# Altium PCB Strum.PcbDoc
Units mil, origin at the board's own origin, x right, y up, seen from the top; angles counter-clockwise.
Board outline 3149.61 x 3937.01 mil, 2 copper layers (Top Layer, Bottom Layer); 5 components, 19 nets, 58 pads, 0 vias.
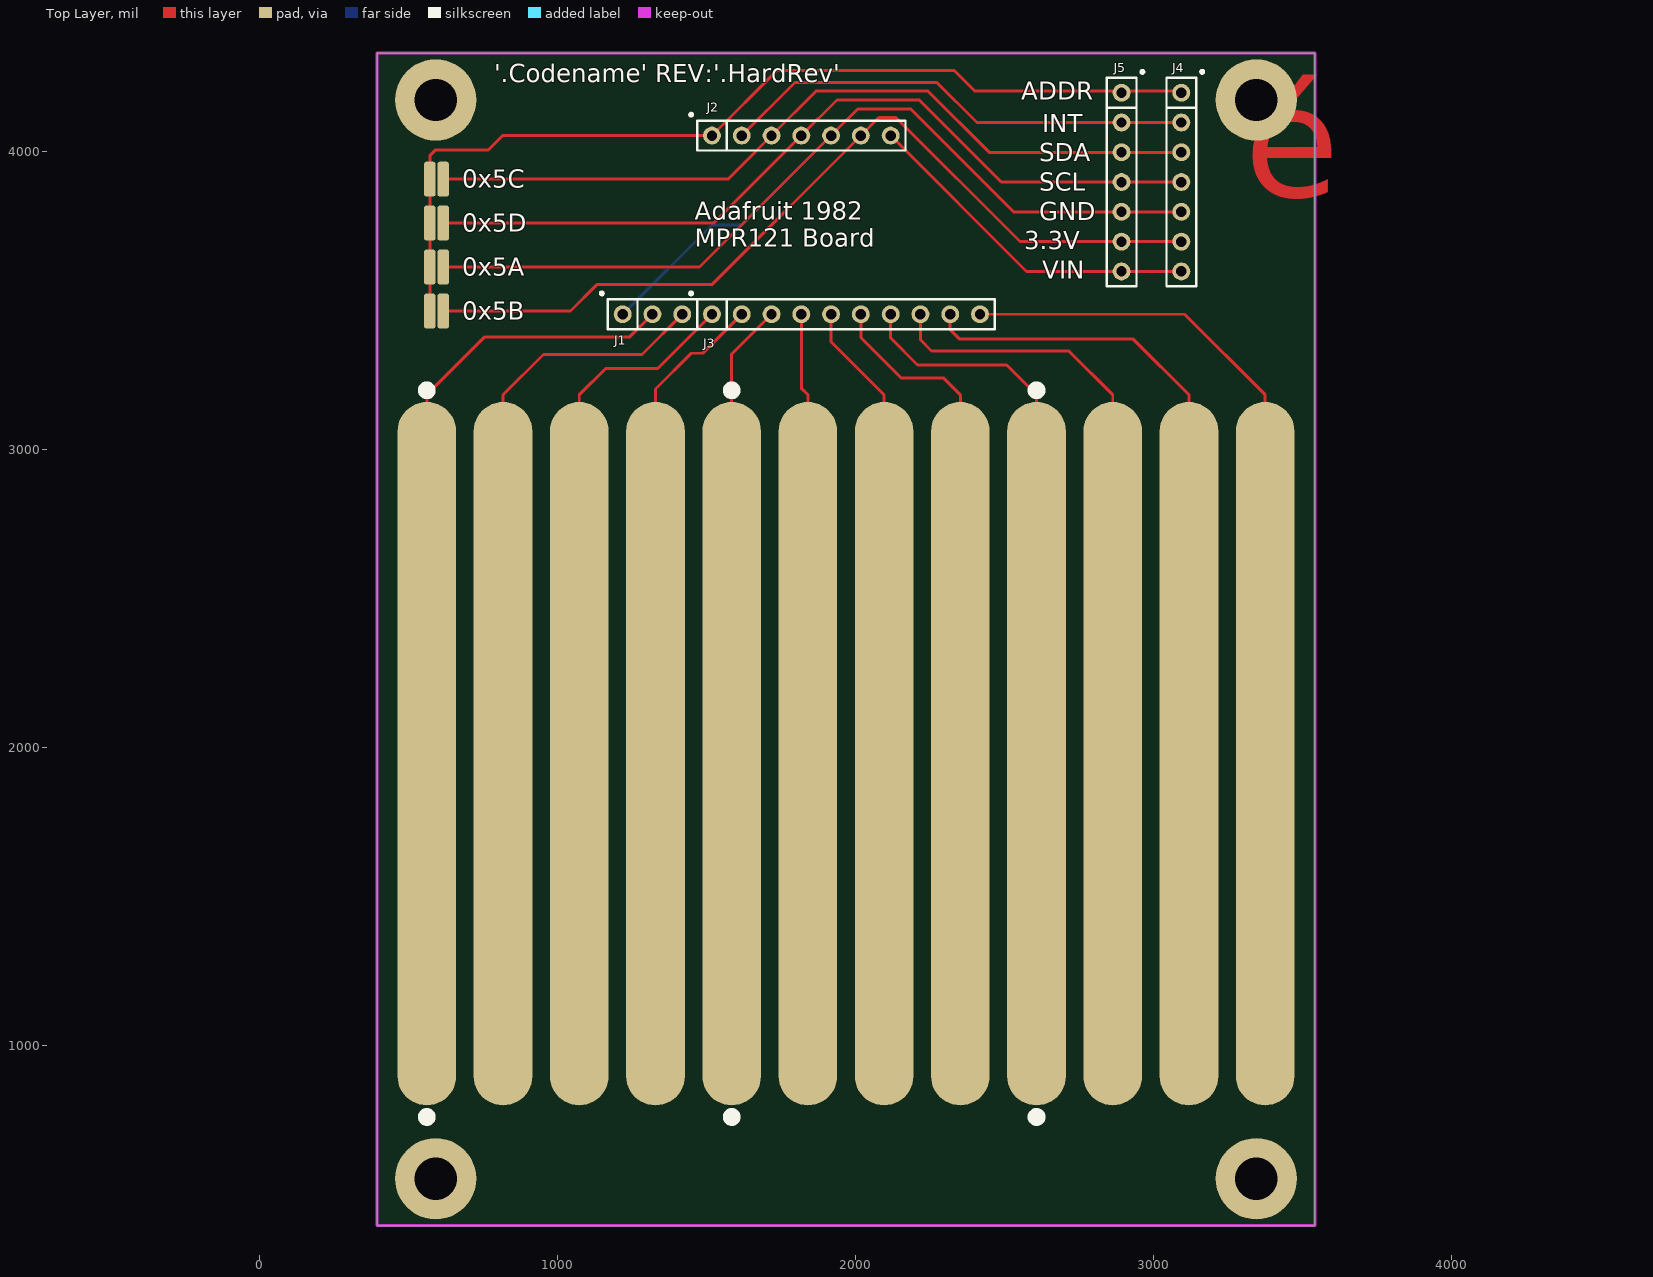
[diagram p0: Top Layer view]
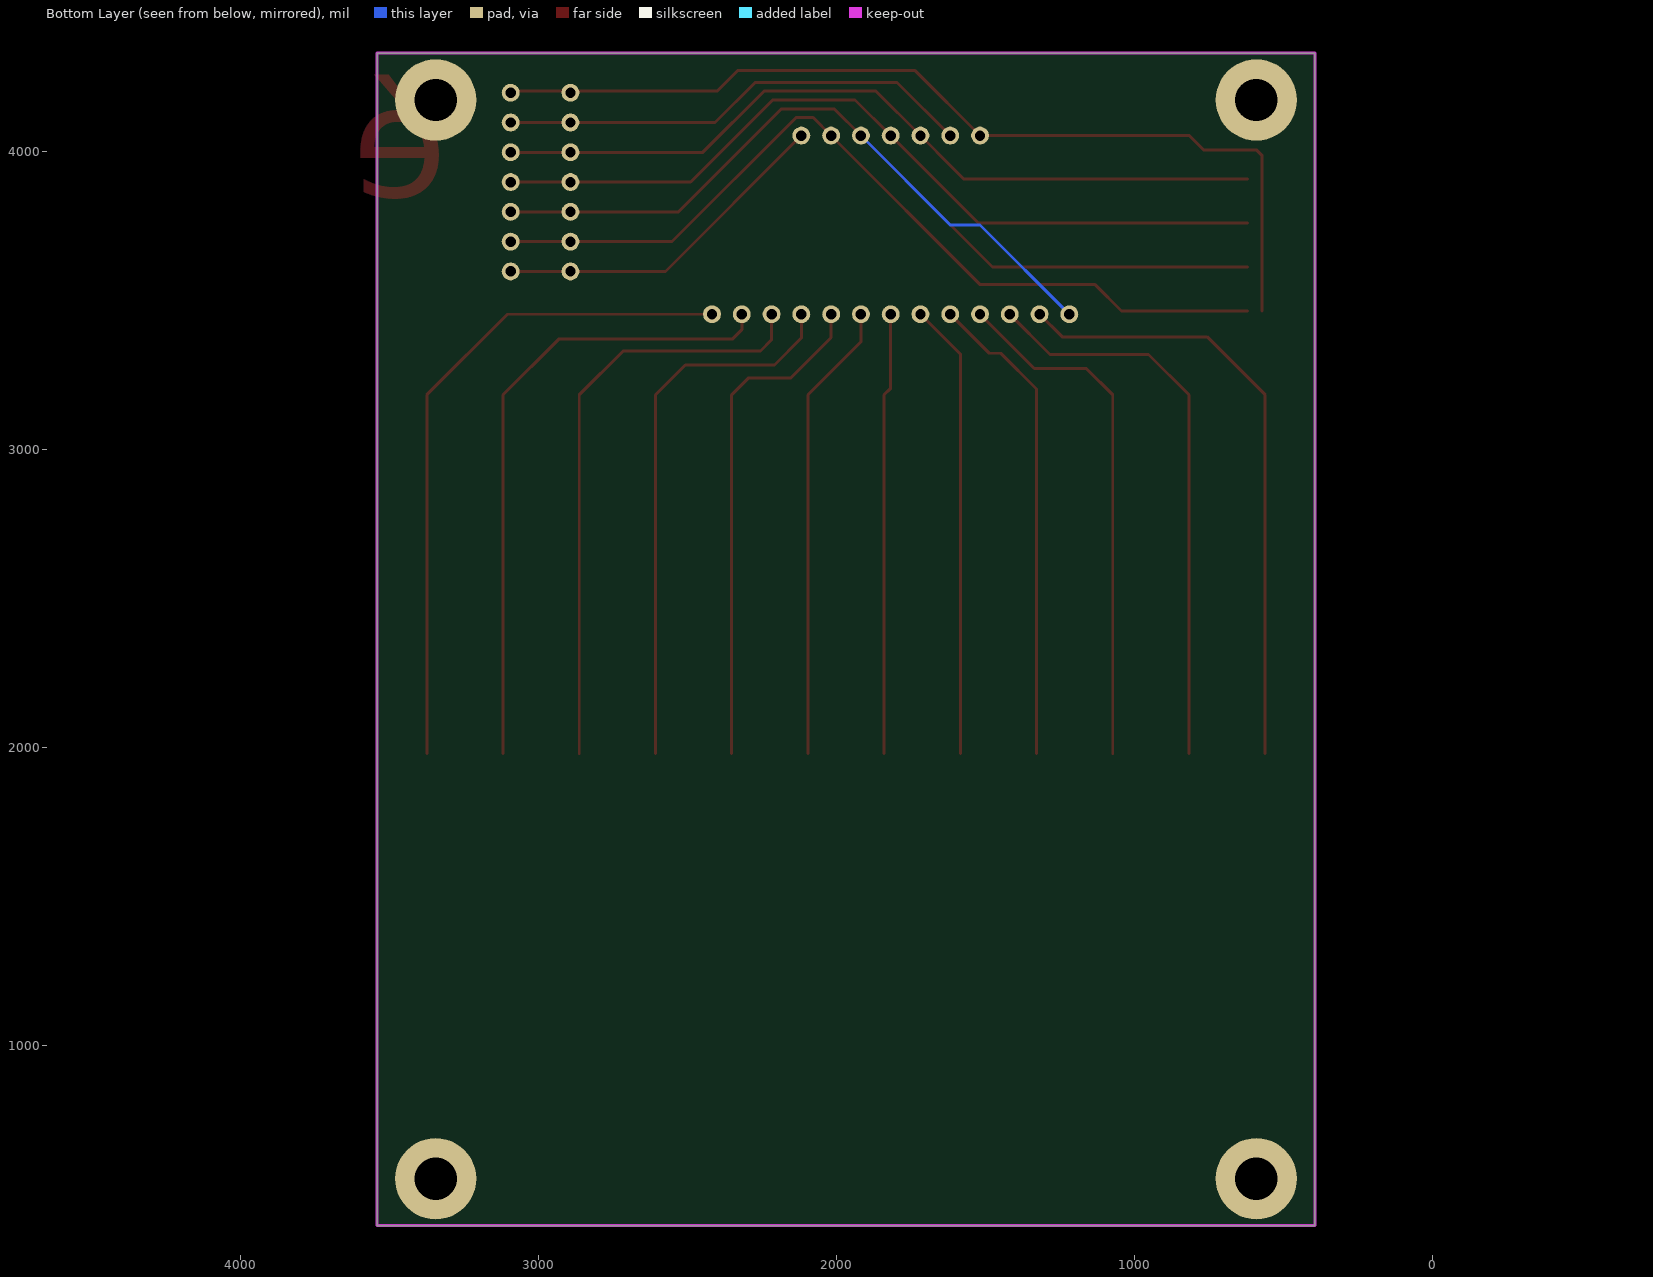
[diagram p1: Bottom Layer view, seen from below]
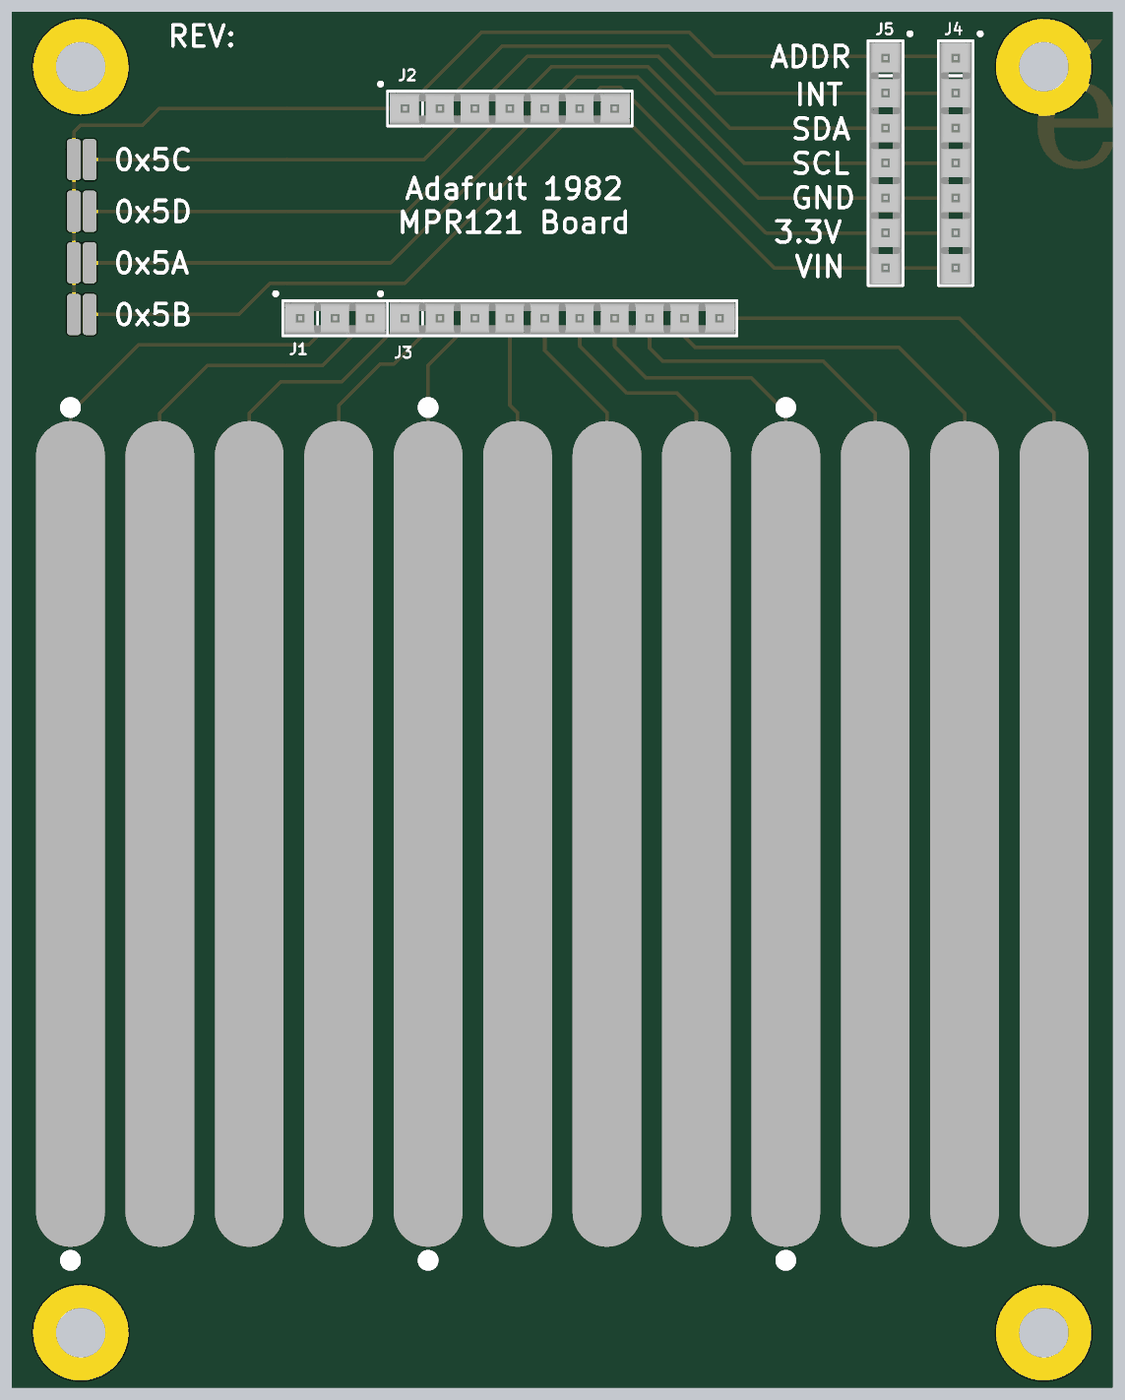
[diagram p2: 3D render of the assembled board from above, using the file's embedded part models]

## Layer stack, top to bottom
Top Solder: solder mask 0.4, Solder Resist, Dk 3.5
Top Layer: signal copper 1.4
Dielectric 1: dielectric 12.6, FR-4, Dk 4.8
Bottom Layer: signal copper 1.4
Bottom Solder: solder mask 0.4, Solder Resist, Dk 3.5

## Board outline
393.7,393.7 3543.31,393.7 3543.31,4330.71 393.7,4330.71

## Design rules (kind name [scope] priority, off if disabled: settings)
Clearance [All] p1: gap=10 ignorepadtopadclearanceinfootprint=FALSE except(0: Arc-Hole Track-Hole SMDPad-Hole THPad-Hole Via-Hole Fill-Hole Poly-Hole Region-Hole Text-Hole; 5: Arc-SMDPad Track-SMDPad SMDPad-SMDPad)
HoleSize [All] p1: absolutevalues=TRUE maxlimit=99999 minlimit=1 maxpercent=80.000 minpercent=20.000
PolygonConnect [All] p1: connectstyle=Relief reliefconductorwidth=10 reliefentries=4 polygonreliefangle="90 Angle" airgapwidth=10
RoutingVias [All] p1: holewidth=28 width=50 viastyle="Through Hole" minholewidth=28 minwidth=50 maxholewidth=28 maxwidth=50
SolderMaskExpansion [All] p1: expansion=4 istentingtop=FALSE
Width [All] p1: maxlimit=10 minlimit=10 preferedwidth=10
29 further rules are at their usual default settings.

## Components (designator, comment, footprint, x,y, rotation, side; value= is the part's Value field where it differs from the comment)
J1 "3-644456-3" TE_3-644456-3 1318.46,3453.78 r0 top
J2 "3-644456-7" TE_3-644456-7 1818.46,4053.78 r0 top
J3 "4-644456-0" TE_4-644456-0 1968.46,3453.78 r0 top
J4 "3-644456-7" TE_3-644456-7 3094.49,3897.64 r270 top
J5 "3-644456-7" TE_3-644456-7 2893.7,3897.64 r270 top

## Footprints (in the part's own frame and the unit in brackets; to place one, negate y for a bottom-side part, rotate by r counter-clockwise, add the part's x,y. Pads: shape width x height; smd on the part's side, far side on the other; paste and mask are expansions set on the pad)
TE_3-644456-3 [mil]
  round 60 hole 35: 1(-100,0) 2(0,0) 3(100,0)
  silkscreen extent -175,-50 150,75, body extent -144,-46 144,46, height 395
TE_3-644456-7 [mil]
  round 60 hole 35: 1(-300,0) 2(-200,0) 3(-100,0) 4(0,0) 5(100,0) 6(200,0) 7(300,0)
  silkscreen extent -375,-50 350,75, body extent -344,-46 344,46, height 395
TE_4-644456-0 [mil]
  round 60 hole 35: 1(-450,0) 2(-350,0) 3(-250,0) 4(-150,0) 5(-50,0) 6(50,0) 7(150,0) 8(250,0) 9(350,0) 10(450,0)
  silkscreen extent -525,-50 500,75, body extent -494,-46 494,46, height 395

## Part data
J1: "CONN HEADER VERT 3POS .100 TIN", Color=Natural, Manufacturer="TE Connectivity", Supplier Part Number 1=A31113-ND, Connector Type="Header, Unshrouded", Contact Finish=Tin, Contact Finish Thickness="150µin (3.81µm)", Contact Mating Length="0.295\" (7.49mm)", Contact Type="Male Pin", Fastening Type=-, Features=-, HelpURL=http://www.te.com/commerce/DocumentDelivery/DDEController?Action=srchrtrv&DocNm=644456&DocType=Customer+Drawing&DocLang=English, Manufacturer Part Number=3-644456-3, Mounting Type="Through Hole", Number of Positions=3, Number of Positions Loaded=All, Number of Rows=1, PartNumber=3-644456-3, Pitch="0.100\" (2.54mm)", Row Spacing=-, Series="MTA-100, AMP", Supplier 1=Digi-Key, Supplier 2=Mouser, Supplier Part Number 2=571-3-644456-3, Termination=Solder
J2 J4 J5: "CONN HEADER VERT 7POS .100 TIN", Color=Natural, Manufacturer="TE Connectivity", Supplier Part Number 1=A31117-ND, Connector Type="Header, Unshrouded", Contact Finish=Tin, Contact Finish Thickness="150µin (3.81µm)", Contact Mating Length="0.295\" (7.49mm)", Contact Type="Male Pin", Fastening Type=-, Features=-, HelpURL=http://www.te.com/commerce/DocumentDelivery/DDEController?Action=srchrtrv&DocNm=644456&DocType=Customer+Drawing&DocLang=English, Manufacturer Part Number=3-644456-7, Mounting Type="Through Hole", Number of Positions=7, Number of Positions Loaded=All, Number of Rows=1, PartNumber=3-644456-7, Pitch="0.100\" (2.54mm)", Row Spacing=-, Series="MTA-100, AMP", Supplier 1=Digi-Key, Supplier 2=Mouser, Supplier Part Number 2=571-3-644456-7, Termination=Solder
J3: "CONN HEADER VERT 10POS .100 TIN", Color=Natural, Manufacturer="TE Connectivity AMP Connectors", Supplier Part Number 1=A30844-ND, @ qty=0, Connector Type="Header, Unshrouded", Contact Finish=Tin, Contact Finish Thickness="150µin (3.81µm)", Contact Mating Length="0.295\" (7.49mm)", Contact Type="Male Pin", Factory Stock=0, Fastening Type=-, Features=-, HelpURL=http://www.te.com/commerce/DocumentDelivery/DDEController?Action=srchrtrv&DocNm=644456&DocType=Customer+Drawing&DocLang=English, Image=http://media.digikey.com/photos/Tyco%20Amp%20Photos/1-644456-0,%204-644456-0,%201-644695-0,%204-644695-0.jpg, Manufacturer Part Number=4-644456-0, Minimum Quantity=1, Mounting Type="Through Hole", Number of Positions=10, Number of Positions Loaded=All, Number of Rows=1, Packaging=Bulk, PartNumber=4-644456-0, Pitch="0.100\" (2.54mm)", Quantity Available=6514, Row Spacing=-, Series=MTA-100, Supplier 1=Digi-Key, Supplier 2=Mouser, Supplier Part Number 2=571-4-644456-0, Termination=Solder, Unit Price (USD)=0.63

## Free pads (board coordinates)
  oval 196.85x2362.2 smd mask+4: 1(561.02,1978.35) 1(816.93,1978.35) 1(1072.83,1978.35) 1(1328.74,1978.35) 1(1584.65,1978.35) 1(1840.55,1978.35) 1(2096.46,1978.35) 1(2352.36,1978.35) 1(2608.27,1978.35) 1(2864.17,1978.35) 1(3120.08,1978.35) 1(3375.98,1978.35)
  round 273 hole 142: 1(590.55,551.18) 1(590.55,4173.23) 1(3346.46,551.18) 1(3346.46,4173.23)
  rrect50% 39.37x118.11 smd: 2(570.87,3464.57) 2(570.87,3612.2) 2(570.87,3759.84) 2(570.87,3907.48) 2(616.08,3464.57) 2(616.08,3612.2) 2(616.08,3759.84) 2(616.08,3907.48)

## Nets (pads, with @x,y where several pads share a name; then routed paths per layer and width w, separated by ;. In a path a pad name is that pad's centre, name@x,y a point inside that pad or via, vN(x,y) a via of type N, cw(c..) or ccw(c..) an arc to the next point about the centre after c; other vN are vias at no path point)
3.3V: J2.6 J4.6 J5.6 pad.2@616.08,3464.57 | length 2916
  Top Layer w10: pad.2@620.08,3464.57 1043.31,3464.57 1131.89,3553.15 1517.83,3553.15 J2.6 2078.86,4114.17 2135.83,4114.17 2552.36,3697.64 J4.6
ADDR: J2.1 J4.1 J5.1 pad.2@570.87,3464.57 pad.2@570.87,3612.2 pad.2@570.87,3759.84 pad.2@570.87,3907.48 | length 3194.2
  Top Layer w10: pad.2@570.87,3464.57 570.87,3612.2 570.87,3759.84 570.87,3907.48 570.87,3986.22 590.55,4005.91 767.72,4005.91 815.59,4053.78 J2.1 1736.34,4271.65 2332.68,4271.65 2401.57,4202.76 3089.37,4202.76 J4.1
GND: J1.1 J2.5 J4.5 J5.5 pad.2@616.08,3612.2 | length 3786.4
  Top Layer w10: pad.2@620.08,3612.2 1476.89,3612.2 J2.5 2008.39,4143.7 2185.04,4143.7 2531.1,3797.64 J4.5
  Bottom Layer w10: J1.1 1518.46,3753.78 1618.46,3753.78 J2.5
INT: J2.2 J4.2 J5.2 | length 1605.7
  Top Layer w10: J2.2 1796.97,4232.28 2273.62,4232.28 2408.27,4097.64 J4.2
PAD0: J1.2 pad.1@561.02,1978.35 | length 2074.3
  Top Layer w10: pad.1@561.02,1978.35 561.02,3183.07 755.91,3377.95 1242.64,3377.95 J1.2
PAD1: J1.3 pad.1@816.93,1978.35 | length 1918.4
  Top Layer w10: pad.1@816.93,1978.35 816.93,3183.07 952.76,3318.9 1283.58,3318.9 J1.3
PAD2: J3.1 pad.1@1072.83,1978.35 | length 1762.5
  Top Layer w10: pad.1@1072.83,1978.35 1072.83,3183.07 1161.42,3271.65 1336.34,3271.65 J3.1
PAD3: J3.2 pad.1@1328.74,1978.35 | length 1618.1
  Top Layer w10: pad.1@1328.74,1978.35 1328.74,3202.76 1448.82,3322.83 1487.52,3322.83 J3.2
PAD4: J3.3 pad.1@1584.65,1978.35 | length 1530.9
  Top Layer w10: pad.1@1584.65,1978.35 1584.65,3319.96 J3.3
PAD5: J3.4 pad.1@1840.55,1978.35 | length 1484.6
  Top Layer w10: J3.4 1818.46,3205.16 1840.55,3183.07 pad.1@1840.55,1978.35
PAD6: J3.5 pad.1@2096.46,1978.35 | length 1549.2
  Top Layer w10: J3.5 1918.46,3361.06 2096.46,3183.07 pad.1@2096.46,1978.35
PAD7: J3.6 pad.1@2352.36,1978.35 | length 1696.8
  Top Layer w10: J3.6 2018.46,3375.24 2153.54,3240.16 2295.28,3240.16 2352.36,3183.07 pad.1@2352.36,1978.35
PAD8: J3.7 pad.1@2608.27,1978.35 | length 1853.6
  Top Layer w10: J3.7 2118.46,3373.66 2208.66,3283.46 2507.87,3283.46 2608.27,3183.07 pad.1@2608.27,1978.35
PAD9: J3.8 pad.1@2864.17,1978.35 | length 2012.7
  Top Layer w10: J3.8 2218.46,3368.15 2255.91,3330.71 2716.54,3330.71 2864.17,3183.07 pad.1@2864.17,1978.35
PAD10: J3.9 pad.1@3120.08,1978.35 | length 2148.8
  Top Layer w10: J3.9 2318.46,3402.01 2350.39,3370.08 2933.07,3370.08 3120.08,3183.07 pad.1@3120.08,1978.35
PAD11: J3.10 pad.1@3375.98,1978.35 | length 2274.4
  Top Layer w10: J3.10 3105.28,3453.78 3375.98,3183.07 pad.1@3375.98,1978.35
SCL: J2.4 J4.4 J5.4 pad.2@616.08,3759.84 | length 2759.8
  Top Layer w10: pad.2@620.08,3759.84 1524.53,3759.84 J2.4 1937.91,4173.23 2214.57,4173.23 2490.16,3897.64 J4.4
SDA: J2.3 J4.3 J5.3 pad.2@616.08,3907.48 | length 2681.7
  Top Layer w10: pad.2@620.08,3907.48 1572.17,3907.48 1611.54,3946.85 J2.3 1867.44,4202.76 2244.09,4202.76 2449.21,3997.64 J4.3
VIN: J2.7 J4.7 J5.7 | length 1165
  Top Layer w10: J2.7 2574.61,3597.64 J4.7

## Keep-outs
Keep-Out Layer:
  the board outline again, w10

## Other copper
Top Layer:
  text "é" at 3305.44,3724.49 h650

## Silkscreen, mask and mechanical layers (free items; w line width, h text height)
Top Overlay:
  circle w40: c2608.27,3198.35 r9.84
  circle w40: c2608.27,758.35 r9.84
  circle w40: c1584.65,3198.35 r9.84
  circle w40: c1584.65,758.35 r9.84
  circle w40: c561.02,758.35 r9.84
  circle w40: c561.02,3198.35 r9.84
  text "'.Codename' REV:'.HardRev'" at 787.56,4232.44 h60
  text "ADDR" at 2557.64,4173.39 h60
  text "INT" at 2627.62,4065.12 h60
  text "SDA" at 2617.62,3966.69 h60
  text "0x5C" at 679.29,3878.11 h60
  text "SCL" at 2617.62,3868.27 h60
  text "GND" at 2617.62,3769.84 h60
  text "0x5D" at 679.29,3730.47 h60
  text "Adafruit 1982 / MPR121 Board" at 1460.83,3681.1 h60
  text "3.3V" at 2567.63,3671.42 h60
  text "0x5A" at 679.29,3582.83 h60
  text "VIN" at 2627.62,3572.99 h60
  text "0x5B" at 679.29,3435.2 h60
Top Solder:
  region: 561.02,3848.43 629.92,3848.43 629.92,3966.54 561.02,3966.54
  region: 561.02,3700.79 629.92,3700.79 629.92,3818.9 561.02,3818.9
  region: 561.02,3553.15 629.92,3553.15 629.92,3671.26 561.02,3671.26
  region: 561.02,3405.51 629.92,3405.51 629.92,3523.62 561.02,3523.62
Mechanical 1:
  the board outline again, w10